# Altium PCB 下层（2层）.pcbdoc
Units mil, origin at the board's own origin, x right, y up, seen from the top; angles counter-clockwise.
Board outline 2611.52 x 2553.07 mil, 2 copper layers (Top Layer, Bottom Layer); 10 components, 14 nets, 28 pads, 9 vias.
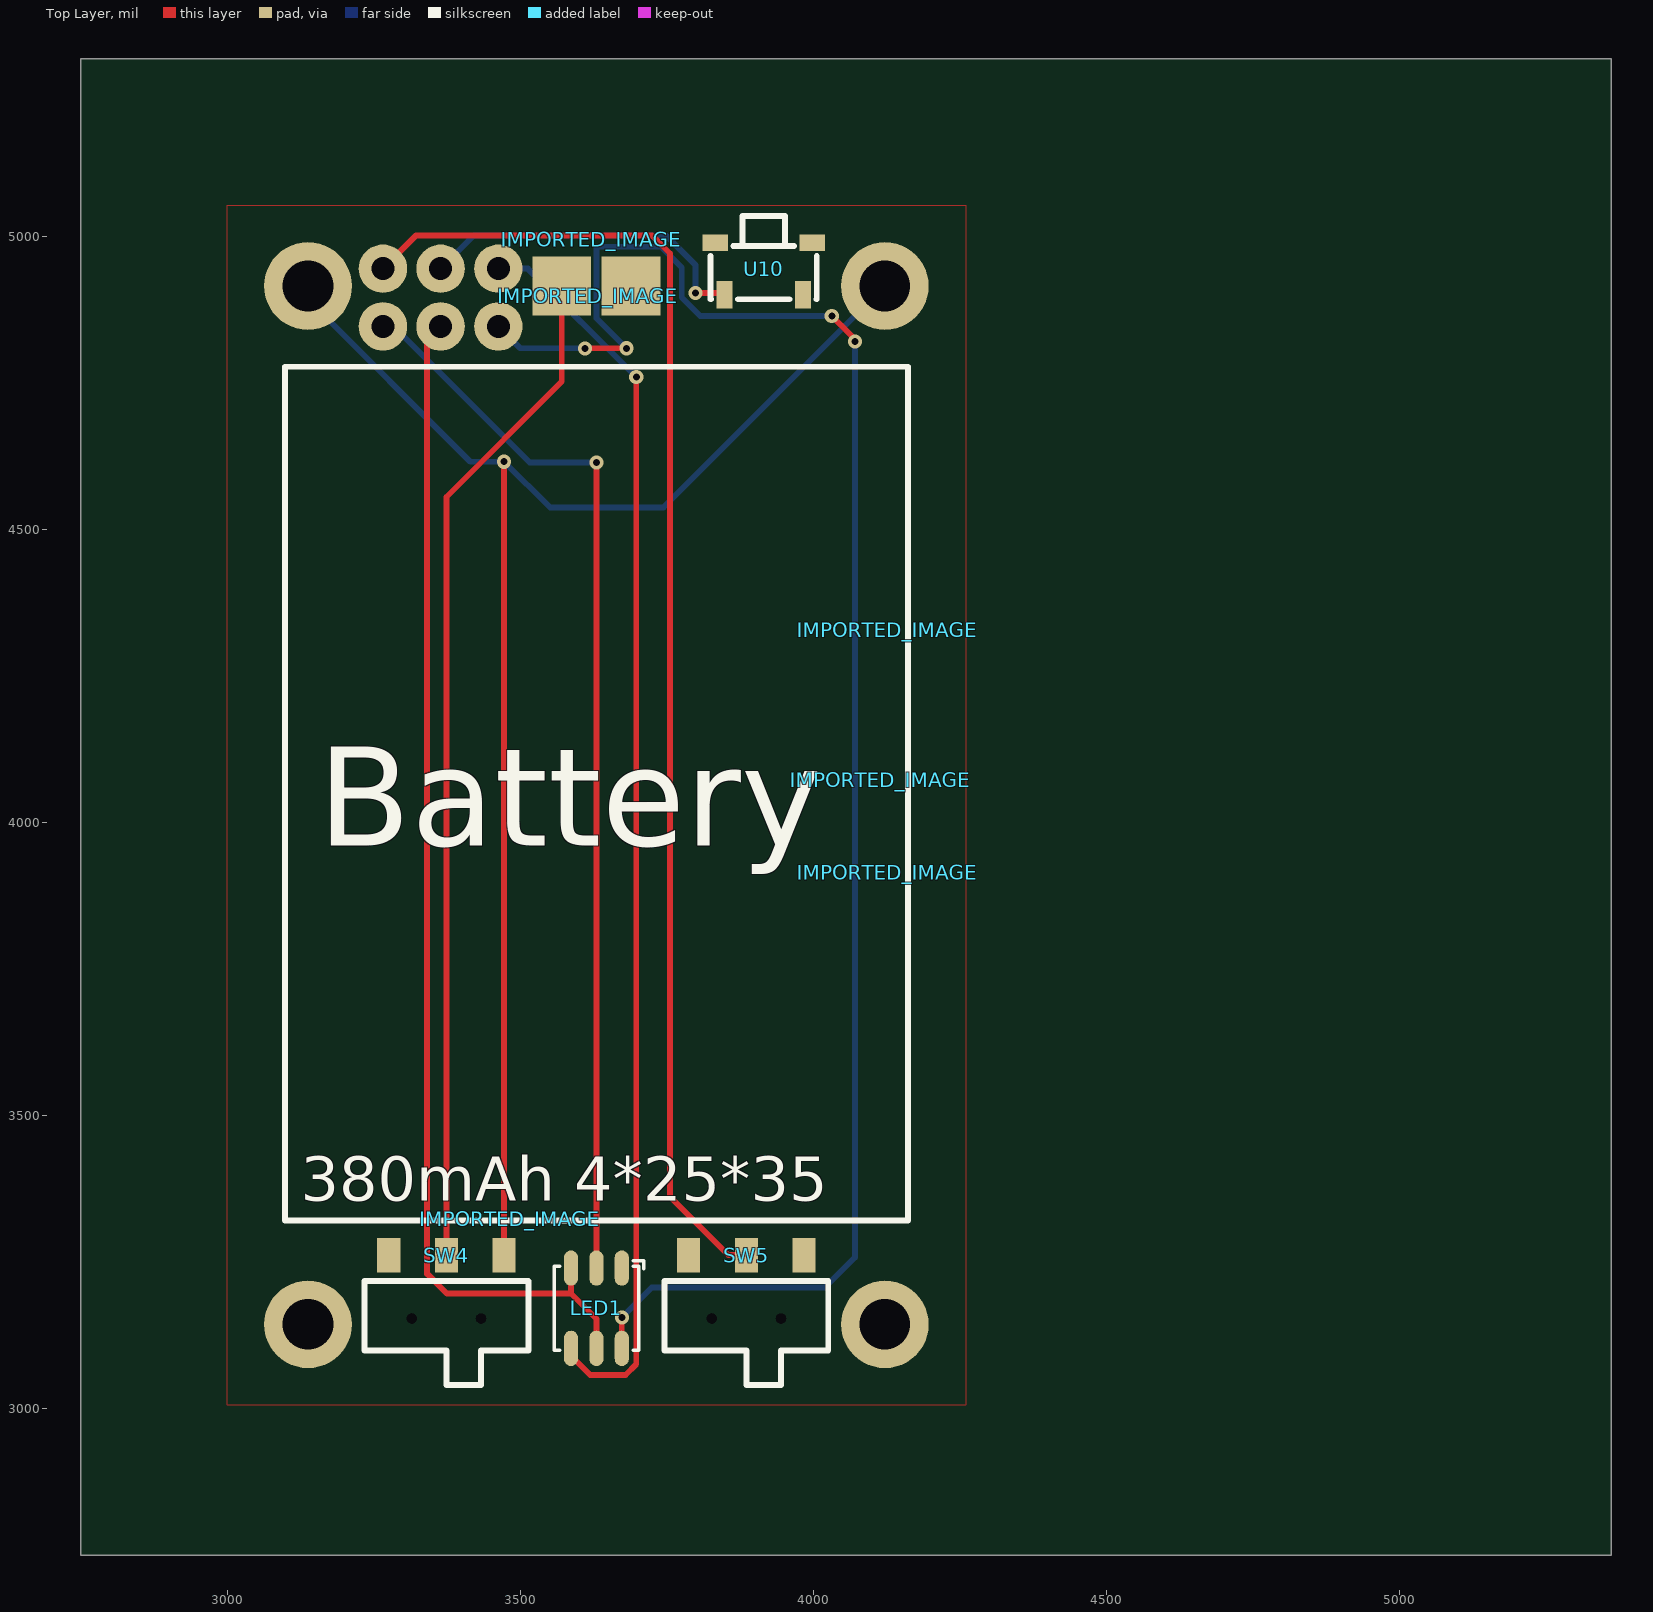
[diagram p0: Top Layer view]
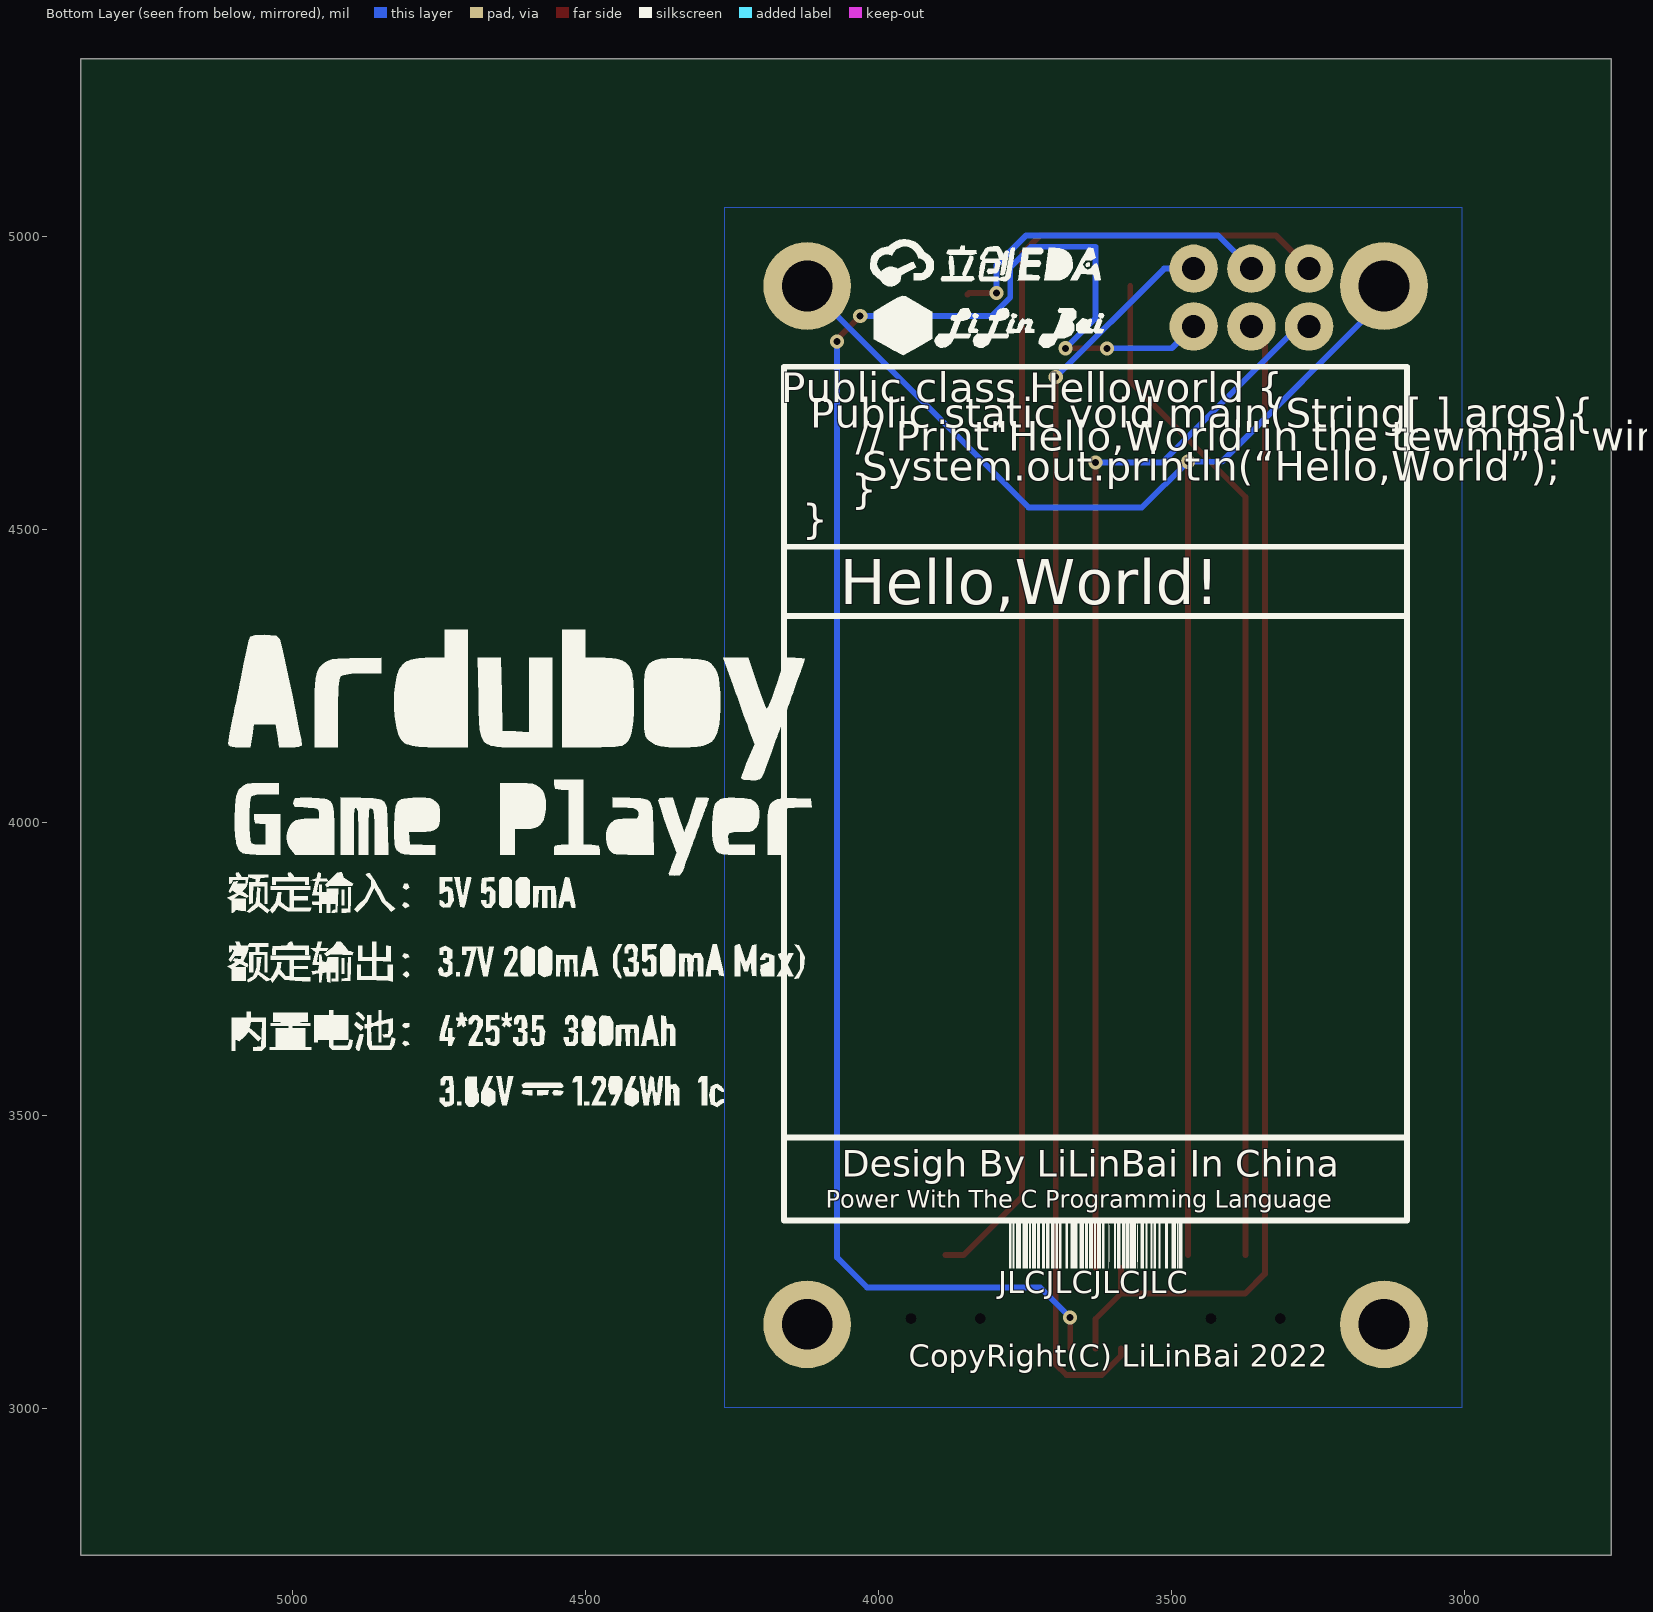
[diagram p1: Bottom Layer view, seen from below]

## Layer stack, top to bottom
Top Solder: solder mask 0.4, Solder Resist, Dk 3.5
Top Layer: signal copper 1.4
Dielectric 1: dielectric 12.6, FR-4, Dk 4.8
Bottom Layer: signal copper 1.4
Bottom Solder: solder mask 0.4, Solder Resist, Dk 3.5

## Board outline
5361.52,2750 2750,2750 2750,5303.07 5361.52,5303.07

## Components (designator, comment, footprint, x,y, rotation, side; value= is the part's Value field where it differs from the comment)
IMPORTED_IMAGE "IMPORTED_IMAGE" IMPORTED_IMAGE 3482.31,3323.52 r0 top
IMPORTED_IMAGE "IMPORTED_IMAGE" IMPORTED_IMAGE 3620.7,4995.22 r0 top
IMPORTED_IMAGE "IMPORTED_IMAGE" IMPORTED_IMAGE 3614.86,4898.86 r0 top
IMPORTED_IMAGE "IMPORTED_IMAGE" IMPORTED_IMAGE 4125.98,4328.66 r0 top
IMPORTED_IMAGE "IMPORTED_IMAGE" IMPORTED_IMAGE 4114.17,4072.76 r0 top
IMPORTED_IMAGE "IMPORTED_IMAGE" IMPORTED_IMAGE 4125.98,3915.28 r0 top
LED1 "TC3838RGBE07-3CJH-E19" LED-SMD_6P-L3.5-W3.5-BL 3629.92,3171.18 r180 top
SW4 "SK-3390A-L1" SW-SMD_SK-3390A-L1 3374.01,3261.73 r0 top
SW5 "SK-3390A-L1" SW-SMD_SK-3390A-L1 3885.82,3261.73 r0 top
U10 "SW-SMD_ST-1100LP" SW-SMD_ST-1100LP 3915.35,4944.8 r270 top

## Footprints (in the part's own frame and the unit in brackets; to place one, negate y for a bottom-side part, rotate by r counter-clockwise, add the part's x,y. Pads: shape width x height; smd on the part's side, far side on the other; paste and mask are expansions set on the pad)
IMPORTED_IMAGE [mil]
LED-SMD_6P-L3.5-W3.5-BL [mil]
  oval 24.25x60.35 smd: 1(43.3,68.56) 2(-0.01,68.56) 3(-43.32,68.56) 4(-43.32,-68.56) 5(-0.01,-68.56) 6(43.3,-68.56)
  silkscreen extent -81,-81 72,72
SW-SMD_SK-3390A-L1 [mm]
  rect 1x1.5 smd: 1(-2.5,0) 2(0,0) 3(2.5,0)
  Multi-Layer board cut-out: -1.275,-2.75 -1.297,-2.652 -1.36,-2.574 -1.45,-2.531 -1.55,-2.531 -1.64,-2.574 -1.703,-2.652 -1.725,-2.75 -1.725,-2.75 -1.703,-2.848 -1.64,-2.926 -1.55,-2.969 -1.45,-2.969 -1.36,-2.926 -1.297,-2.848 -1.275,-2.75
  Multi-Layer board cut-out: 1.725,-2.75 1.703,-2.652 1.64,-2.574 1.55,-2.531 1.45,-2.531 1.36,-2.574 1.297,-2.652 1.275,-2.75 1.275,-2.75 1.297,-2.848 1.36,-2.926 1.45,-2.969 1.55,-2.969 1.64,-2.926 1.703,-2.848 1.725,-2.75
  silkscreen extent -3.55,-5.63 3.55,-1.12
SW-SMD_ST-1100LP [mm]
  rect 1.2x0.7 smd: 1(1.125,1.7) 2(1.125,-1.7)
  rect 0.7x1.1 smd: 3(-1.125,-2.1) 4(-1.125,2.1)
  silkscreen extent -2.28,-2.3 1.32,2.3

## Free pads (board coordinates)
  round 149.61 hole 86.61 copper offset -0.02,-0.01: 1(3137.81,3143.63)
  round 149.61 hole 86.61 copper offset -0.02,0: 1(3137.81,4915.28)
  round 149.61 hole 86.61 copper offset -0.01,-0.01: 1(4122.05,3143.63)
  round 149.61 hole 86.61 copper offset -0.01,0: 1(4122.05,4915.28)
  rect 100x100 smd: 2(3570.86,4915.27) 2(3688.97,4915.27)
  round 82.68 hole 39.37: 3(3265.74,4846.38) 3(3364.17,4846.38)
  round 82.68 hole 39.37 copper offset 0,-0.01: 3(3265.74,4944.82)
  round 82.68 hole 39.37 copper offset 0.01,-0.01: 3(3364.16,4944.82)
  round 82.68 hole 39.37 copper offset -0.01,-0.01: 3(3462.6,4846.38) 3(3462.6,4944.82)

## Via types
v1: diameter 24, hole 12, Top Layer to Bottom Layer, 9 vias

## Nets (pads, with @x,y where several pads share a name; then routed paths per layer and width w, separated by ;. In a path a pad name is that pad's centre, name@x,y a point inside that pad or via, vN(x,y) a via of type N, cw(c..) or ccw(c..) an arc to the next point about the centre after c; other vN are vias at no path point)
BEEP-: pad.3@3265.74,4944.82 SW5.2 | length 2307.1
  Top Layer w10: pad.3@3265.74,4944.8 3322.58,5001.64 3724.58,5001.64 3755.62,4970.59 3755.62,3361.23 3855.13,3261.73 SW5.2
BT+: pad.2@3570.86,4915.27 SW4.2 | length 1735.1
  Top Layer w10: SW4.2 3374.01,4555.38 3570.86,4752.23 pad.2@3570.86,4915.28
GND: LED1.4 pad.1@3137.81,3143.63 pad.1@4122.05,3143.63 pad.2@3688.97,4915.27 SW5.3 U10.1
KEYPOWER: pad.3@3364.16,4944.82 U10.2 | length 577.4
  Top Layer w10: v1(3799.21,4903.47) 3845.45,4903.47 U10.2
  Bottom Layer w10: pad.3@3364.16,4944.8 3421.01,5001.64 3748.29,5001.64 3799.21,4950.71 v1(3799.21,4903.47)
LEDB+: LED1.3 pad.3@3462.6,4846.38 | length 3024.4
  Top Layer w10: v1(3610.21,4808.94) v1(3681.1,4808.98) ; LED1.3 v1(3673.23,3155.44) ; v1(4031.5,4864.1) 4070.86,4824.73 v1(4070.87,4820.79)
  Bottom Layer w10: pad.3@3462.61,4846.34 3500.01,4808.94 v1(3610.21,4808.94) ; v1(3673.23,3155.44) 3724.41,3206.63 4019.71,3206.63 4070.86,3257.79 v1(4070.87,4820.79) ; v1(3681.1,4808.98) 3629.92,4860.16 3629.92,4982.21 3740.16,4982.21 3775.59,4946.77 3775.59,4895.59 3807.09,4864.1 v1(4031.5,4864.1)
LEDG+: LED1.1 pad.3@3462.6,4944.82 | length 2141.2
  Top Layer w10: LED1.1 3586.62,3090 3619.36,3057.26 3679.47,3057.26 3697.95,3075.73 v1(3697.94,4759.86)
  Bottom Layer w10: pad.3@3462.59,4944.8 3513,4944.8 v1(3697.94,4759.86)
LEDG-: LED1.2 LED1.6 pad.3@3364.17,4846.38 | length 2040.6
  Top Layer w10: pad.3@3364.18,4846.38 3341.15,4823.35 3341.15,3229.75 3374.76,3196.15 3586.62,3196.15 ; LED1.6 3586.62,3196.15 ; LED1.2 3629.92,3152.84 3586.62,3196.15
LEDR-: LED1.5 pad.3@3265.74,4846.38 | length 1834.8
  Top Layer w10: LED1.5 v1(3629.92,4614.15)
  Bottom Layer w10: pad.3@3265.74,4846.38 3283.84,4846.38 3516.07,4614.15 v1(3629.92,4614.15)
SW1_3: U10.3
SW1_4: U10.4
SW4_1: SW4.1
SW5_1: SW5.1
VDD: pad.1@3137.81,4915.28 pad.1@4122.05,4915.28 SW4.3 | length 2664.2
  Top Layer w10: SW4.3 v1(3472.43,4615.43)
  Bottom Layer w10: pad.1@3137.79,4915.28 3137.79,4892.45 3414.82,4615.43 v1(3472.43,4615.43) ; v1(3472.43,4615.43) 3551.18,4537.32 3744.09,4537.32 pad.1@4122.05,4915.27
"": 

## Polygon pours and split planes (outlines as drawn)
GND on Top Layer (hatched 45Degree grid 30 track 10, remove dead copper): 3000,5053.07 4259.84,5053.07 4259.84,3005.83 3000,3005.83 3000,3025.51 3000,3057.01
GND on Bottom Layer (hatched 45Degree grid 30 track 10, remove dead copper, pour order 1): 3003.94,5049.13 4263.78,5049.13 4263.78,3001.89 3003.94,3001.89 3003.94,3017.64

## Silkscreen, mask and mechanical layers (free items; w line width, h text height)
Top Overlay:
  lines w10: 3098.42,3320.79 4161.41,3320.79 4161.41,4777.48 3098.42,4777.48 3098.42,3320.79
  text "Battery" at 3154.63,3960.27 h169.55
  text "380mAh 4*25*35" at 3125.82,3354.48 h75.35
Bottom Overlay:
  lines w10: 3098.42,3320.79 4161.41,3320.79 ; 3098.42,3320.79 3098.42,4777.48 4161.41,4777.48 4161.41,3320.79 ; 3098.42,3320.8 4161.41,3320.8 ; 3098.42,3320.8 3098.42,3462.53 4161.41,3462.53 4161.41,3320.8 ; 3098.42,4352.29 4161.41,4352.29 4161.41,4470.4 3098.42,4470.4 3098.42,4352.29
  text "Public class Helloworld {" at 4166.36,4716.78 h50.56
  text "Public static void main(String[ ] args){" at 4116.54,4673.47 h50.56
  text "// Print\"Hello,World\"in the tewminal window" at 4038.86,4634.1 h50.56
  text "System.out.println(“Hello,World”);" at 4027.8,4582.92 h50.56
  text "}" at 4046.92,4543.54 h50.3
  text "}" at 4130.32,4492.37 h50.56
  text "Hello,World!" at 4066.65,4372.36 h76.56
  text "Desigh By LiLinBai In China" at 4062.66,3395.31 h45.21
  text "Power With The C Programming Language" at 4090.22,3342.91 h30.14
  text "JLCJLCJLCJLC" at 3795.64,3196.93 h37.68
  text "CopyRight(C) LiLinBai 2022" at 3948.57,3070.94 h37.68
Mechanical 1:
  lines w10: 3039.37,3123.94 ccw(c3118.11,3123.94) 3118.11,3045.2 4141.73,3045.2 ccw(c4141.73,3123.94) 4220.47,3123.94 4220.47,4934.96 ccw(c4141.73,4934.96) 4141.73,5013.7 3118.11,5013.7 ccw(c3118.11,4934.96) 3039.37,4934.96 3039.37,3123.94